# Altium PCB PCB3.PcbDoc
Units mm, origin at the board's own origin, x right, y up, seen from the top; angles counter-clockwise.
Board outline 41.4 x 25.91 mm, 2 copper layers (Top Layer, Bottom Layer), stack 1.569 mm thick; 4 components, 10 nets, 46 pads, 0 vias.
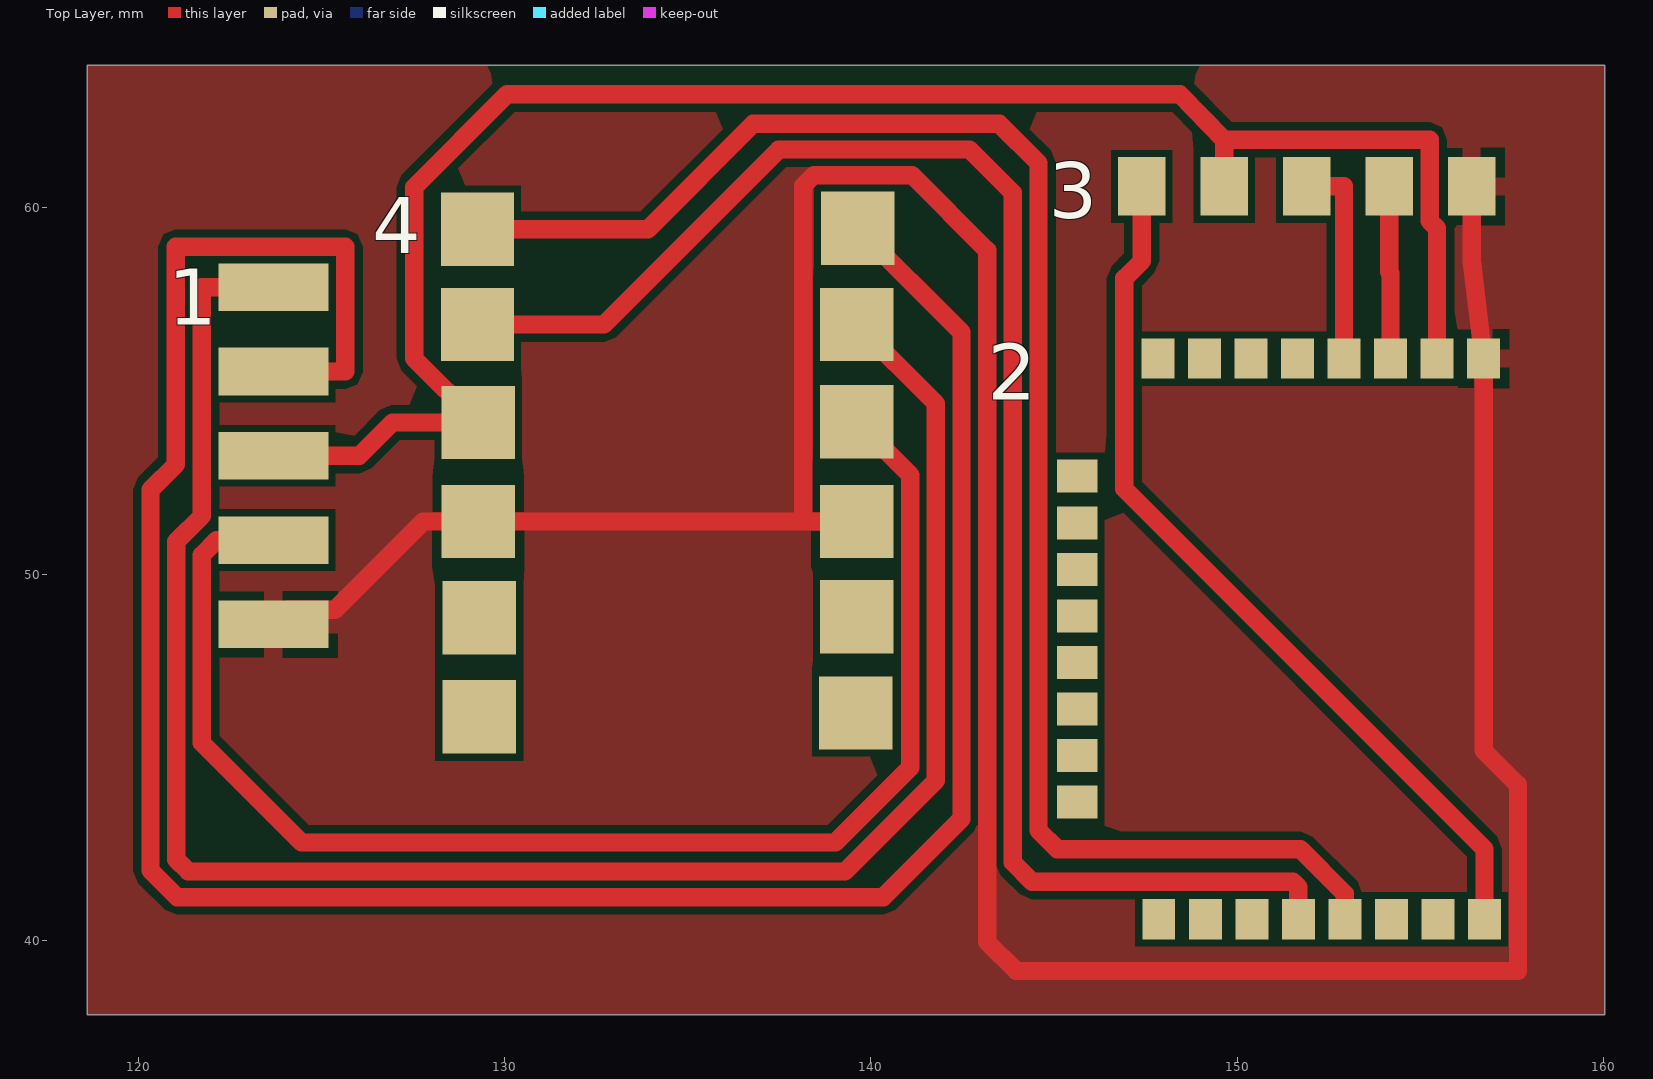
[diagram p0: Top Layer view]
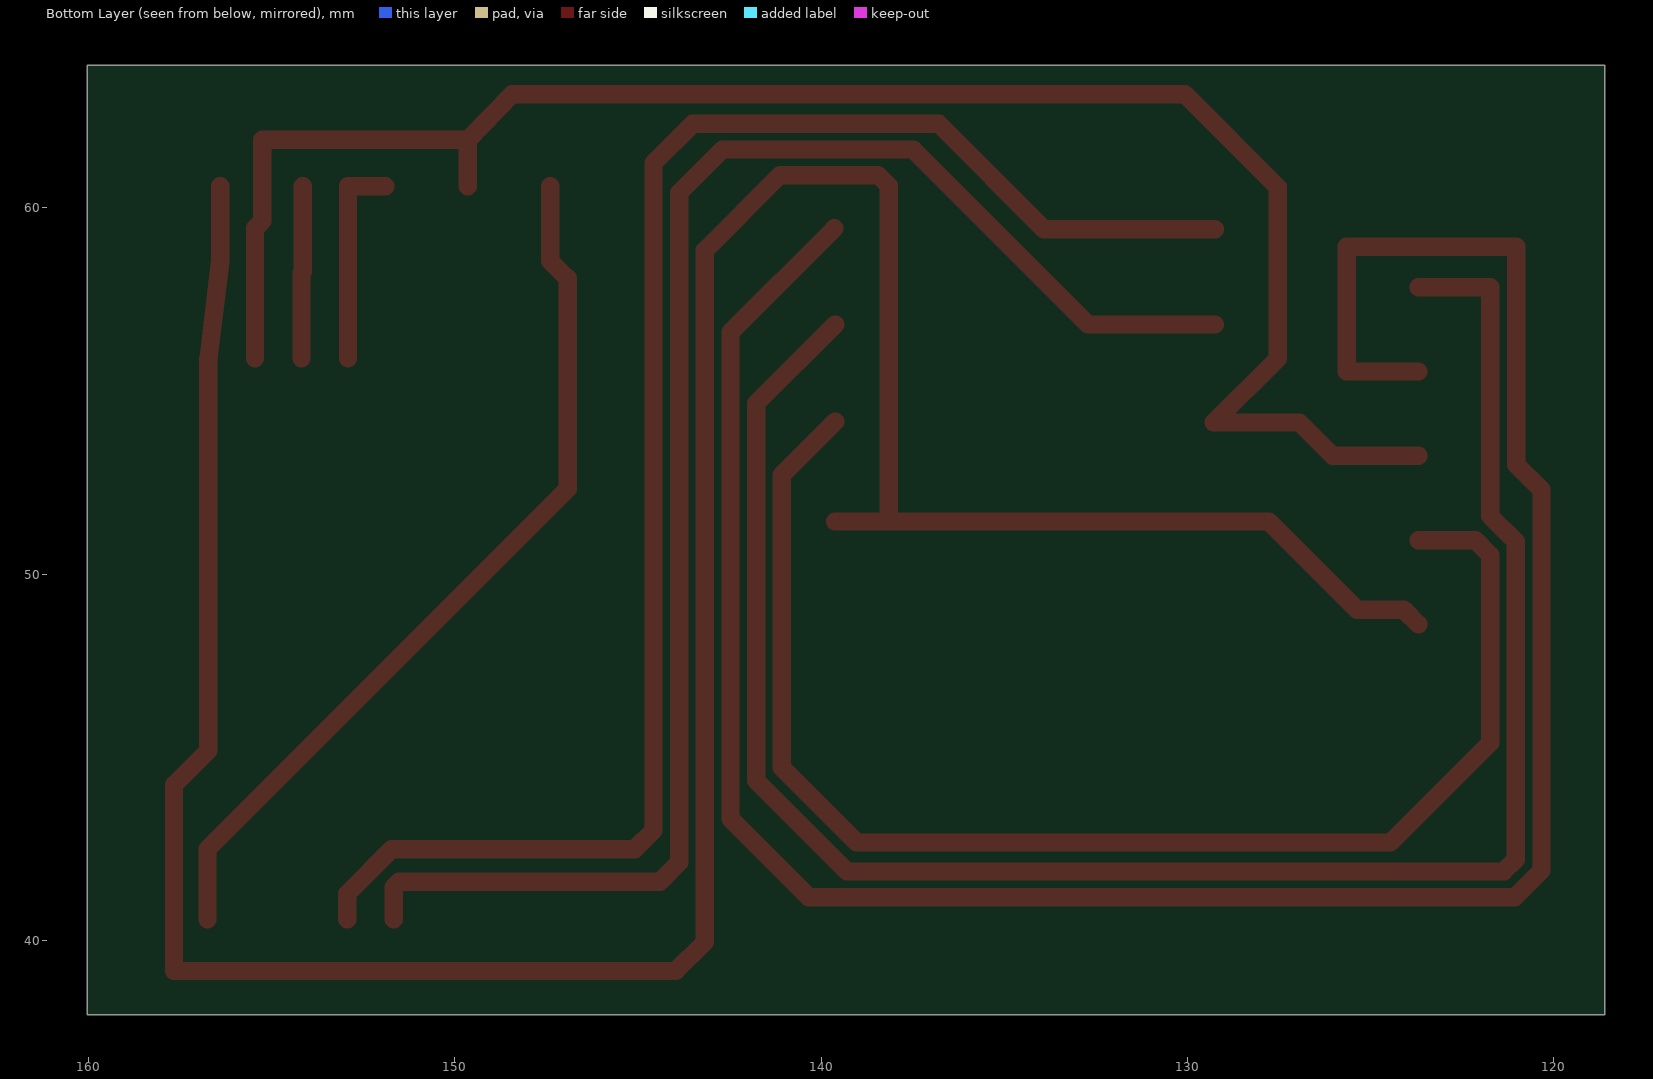
[diagram p1: Bottom Layer view, seen from below]

## Layer stack, top to bottom
Top Solder: solder mask 0.0254, SM-001, Dk 4
Top Layer: signal copper 0.035
Dielectric 1: core 1.4986, Core-043, Dk 4.3
Bottom Layer: signal copper 0.035
Bottom Solder: solder mask 0.0254, SM-001, Dk 4

## Board outline
118.618,37.973 160.02,37.973 160.02,63.881 118.618,63.881

## Design rules (kind name [scope] priority, off if disabled: settings)
Clearance [All] p1: gap=0.2 ignorepadtopadclearanceinfootprint=FALSE
MinimumSolderMaskSliver [All] p1: minsoldermaskwidth=0.1
PolygonConnect [All] p1: connectstyle=Relief reliefconductorwidth=0.5 reliefentries=4 polygonreliefangle="90 Angle" airgapwidth=0.254
RoutingLayers [All] p1: top layer_v5=TRUE bottom layer_v5=FALSE
RoutingVias [All] p1: holewidth=0.711 width=1.27 viastyle="Through Hole" minholewidth=0.711 minwidth=1.27 maxholewidth=0.711 maxwidth=1.27
SilkToSolderMaskClearance [IsPad] p1: minsilkscreentomaskgap=0.1 clearancetoexposedcopper=TRUE
SolderMaskExpansion [All] p1: expansion=0.102 istentingtop=FALSE
Width [All] p1: maxlimit=1 minlimit=0.5 preferedwidth=0.5
27 further rules are at their usual default settings.

## Components (designator, comment, footprint, x,y, rotation, side; value= is the part's Value field where it differs from the comment)
1 "Arduino connecter" Arduino 123.673,48.627 r0 top
2 "CC2530" CC2530 156.718,40.83 r90 top
3 "DEBUG" DEBUG 147.392,60.579 r270 top
4 "LLV" LLV 127.911,44.885 r0 top

## Footprints (in the part's own frame and the unit in brackets; to place one, negate y for a bottom-side part, rotate by r counter-clockwise, add the part's x,y. Pads: shape width x height; smd on the part's side, far side on the other; paste and mask are expansions set on the pad)
Arduino [mm]
  rect 3x1.3 smd: 49(0.025,9.2) 50(0.025,6.9) 51(0.025,4.6) 52(0.025,2.3) 53(0.025,0)
CC2530 [mm]
  rect 1.1x0.9 smd: 5(15.05,0) 6(15.05,1.27) 7(15.05,2.54) 8(15.05,3.81) 9(15.05,5.08) 10(15.05,6.35) 11(15.05,7.62) 12(15.05,8.89) 21(-0.25,8.865) 22(-0.25,7.595) 23(-0.25,6.325) 24(-0.25,5.055) 25(-0.25,3.785) 26(-0.25,2.515) 27(-0.25,1.245) 28(-0.25,-0.025)
  rect 0.9x1.1 smd: 13(11.84,11.09) 14(10.57,11.09) 15(9.3,11.09) 16(8.03,11.09) 17(6.76,11.09) 18(5.49,11.09) 19(4.22,11.09) 20(2.95,11.09)
DEBUG [mm]
  rect 1.6x1.3 smd: 29(0,9) 30(0,6.75) 31(0,4.5) 32(0,0) 33(0,2.25)
LLV [mm]
  rect 2x2 smd: 54(1.35,14.525) 55(1.35,11.925) 56(1.375,9.25) 57(1.375,6.55) 58(1.4,3.925) 59(1.4,1.225) 60(11.725,14.55) 61(11.7,11.925) 62(11.7,9.275) 63(11.7,6.55) 64(11.7,3.95) 65(11.675,1.325)

## Nets (pads, with @x,y where several pads share a name; then routed paths per layer and width w, separated by ;. In a path a pad name is that pad's centre, name@x,y a point inside that pad or via, vN(x,y) a via of type N, cw(c..) or ccw(c..) an arc to the next point about the centre after c; other vN are vias at no path point)
GND: 1.53 2.5 3.29 4.57 4.63 | length 87.7
  Top Layer w0.5: 1.53 124.098,49.027 125.374,49.027 127.782,51.435 4.57 138.151,51.435 ; 4.63 138.151,51.435 ; 3.29 156.392,58.543 2.5 156.718,45.187 157.658,44.247 157.658,39.167 143.967,39.167 143.172,39.962 143.172,58.835 141.121,60.885 138.443,60.885 138.151,60.592 138.151,51.435
Net1_49: 1.49 4.61 | length 53.1
  Top Layer w0.5: 1.49 121.742,57.827 121.742,51.587 121.042,50.887 121.042,42.215 121.372,41.885 139.29,41.885 141.772,44.366 141.772,54.649 4.61
Net1_50: 1.50 4.60 | length 67.9
  Top Layer w0.5: 1.50 125.654,55.527 125.654,58.928 121.031,58.928 121.031,52.991 120.342,52.302 120.342,41.91 121.068,41.185 140.334,41.185 142.472,43.322 142.472,56.599 4.60
Net1_51: 1.51 2.6 3.33 4.56 | length 49.7
  Top Layer w0.5: 1.51 126.035,53.227 126.943,54.135 4.56 127.533,55.888 127.533,60.554 130.073,63.094 148.423,63.094 149.642,61.849 ; 3.33 149.642,61.849 ; 2.6 155.448,59.436 155.245,59.639 155.245,61.849 149.642,61.849
Net1_52: 1.52 4.62 | length 38.6
  Top Layer w0.5: 1.52 122.149,50.927 121.742,50.521 121.742,45.393 124.46,42.675 139.025,42.675 141.072,44.722 141.072,52.699 4.62
Net2_7: 2.7 3.30 | length 4.7
  Top Layer w0.5: 3.30 154.142,58.253 154.178,58.217 2.7
Net2_8: 2.8 3.31 | length 5.7
  Top Layer w0.5: 3.31 152.908,60.579 2.8
Net2_24: 2.24 4.55 | length 44.3
  Top Layer w0.5: 4.55 132.711,56.81 137.486,61.585 142.69,61.585 143.872,60.404 143.872,42.133 144.399,41.605 151.511,41.605 151.663,41.453 2.24
Net2_25: 2.25 4.54 | length 44.9
  Top Layer w0.5: 4.54 133.911,59.41 136.786,62.285 143.501,62.285 144.572,61.214 144.572,43.007 145.085,42.494 151.714,42.494 152.933,41.275 2.25
Net2_28: 2.28 3.32 | length 24.3
  Top Layer w0.5: 3.32 147.392,58.547 146.914,58.069 146.914,52.324 156.743,42.495 2.28
pads on no net: 2.9 2.10 2.11 2.12 2.13 2.14 2.15 2.16 2.17 2.18 2.19 2.20 2.21 2.22 2.23 2.26 2.27 4.58 4.59 4.64 4.65

## Polygon pours and split planes (outlines as drawn)
GND on Top Layer "GND_L01_P000" (solid, pour order 0): 118.618,63.881 118.618,37.973 160.02,37.973 160.02,63.881

## Silkscreen, mask and mechanical layers (free items; w line width, h text height)
Mechanical 1:
  lines w0.254: 118.618,37.973 158.623,37.973 160.02,37.973 160.02,63.881 118.618,63.881 118.618,37.973